# Altium PCB Projekat.PcbDoc
Units mm, origin at the board's own origin, x right, y up, seen from the top; angles counter-clockwise.
Board outline 81 x 149.5 mm, 2 copper layers (F.Cu, B.Cu); 58 components, 65 nets, 205 pads, 2 vias.
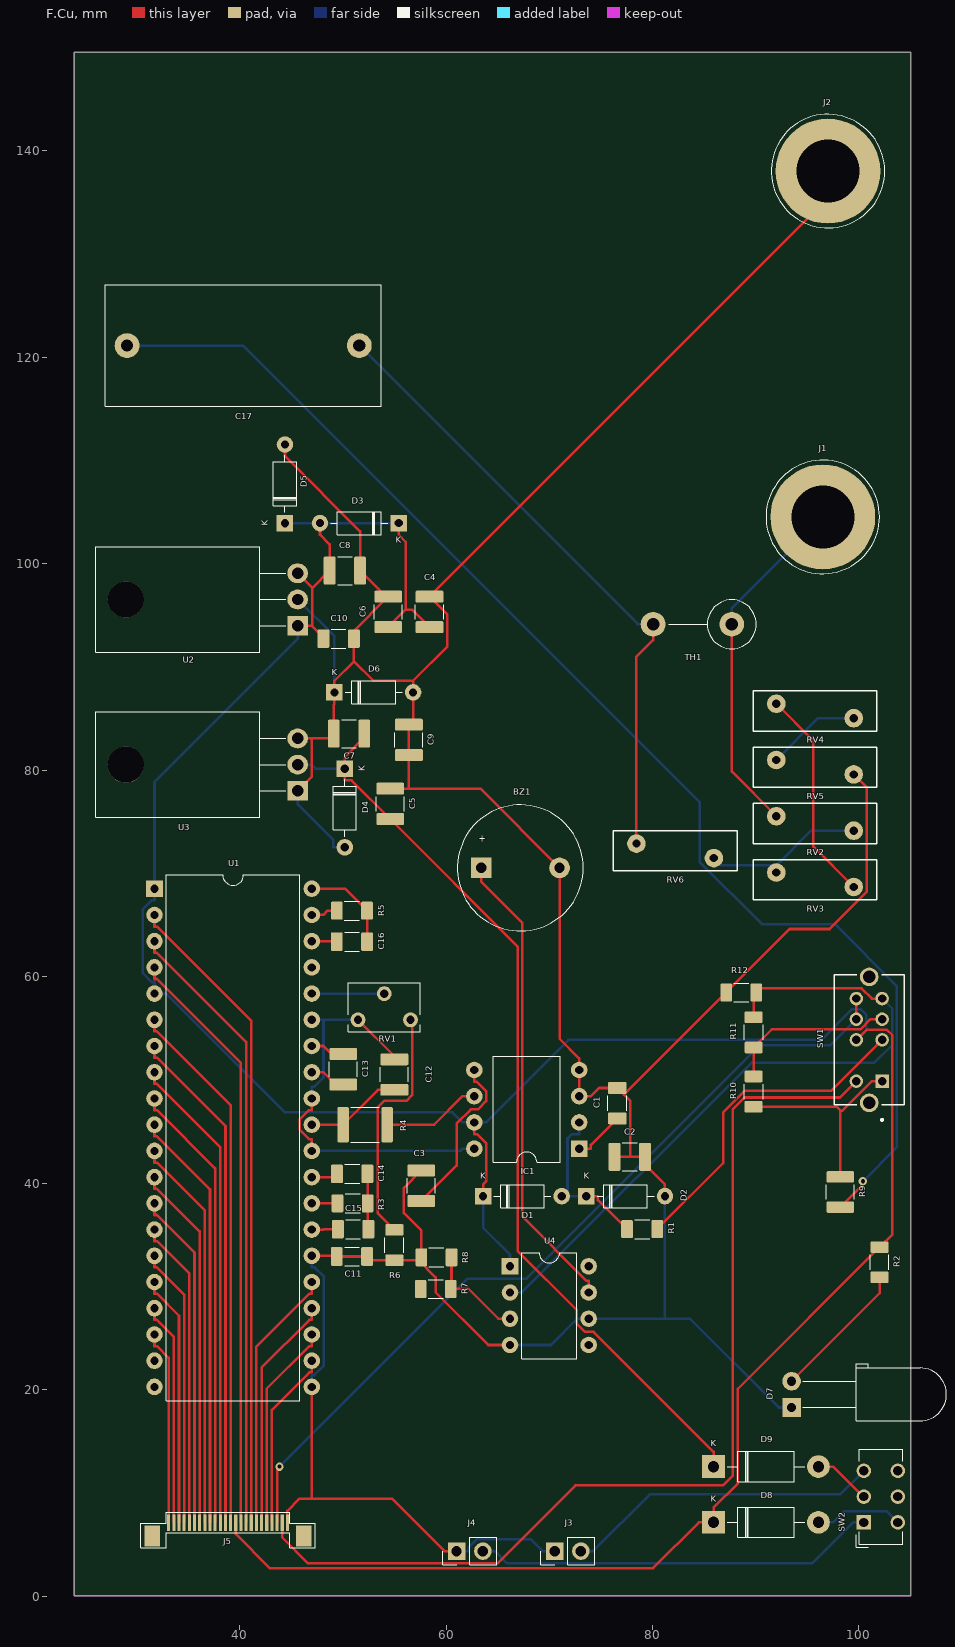
[diagram p0: F.Cu view]
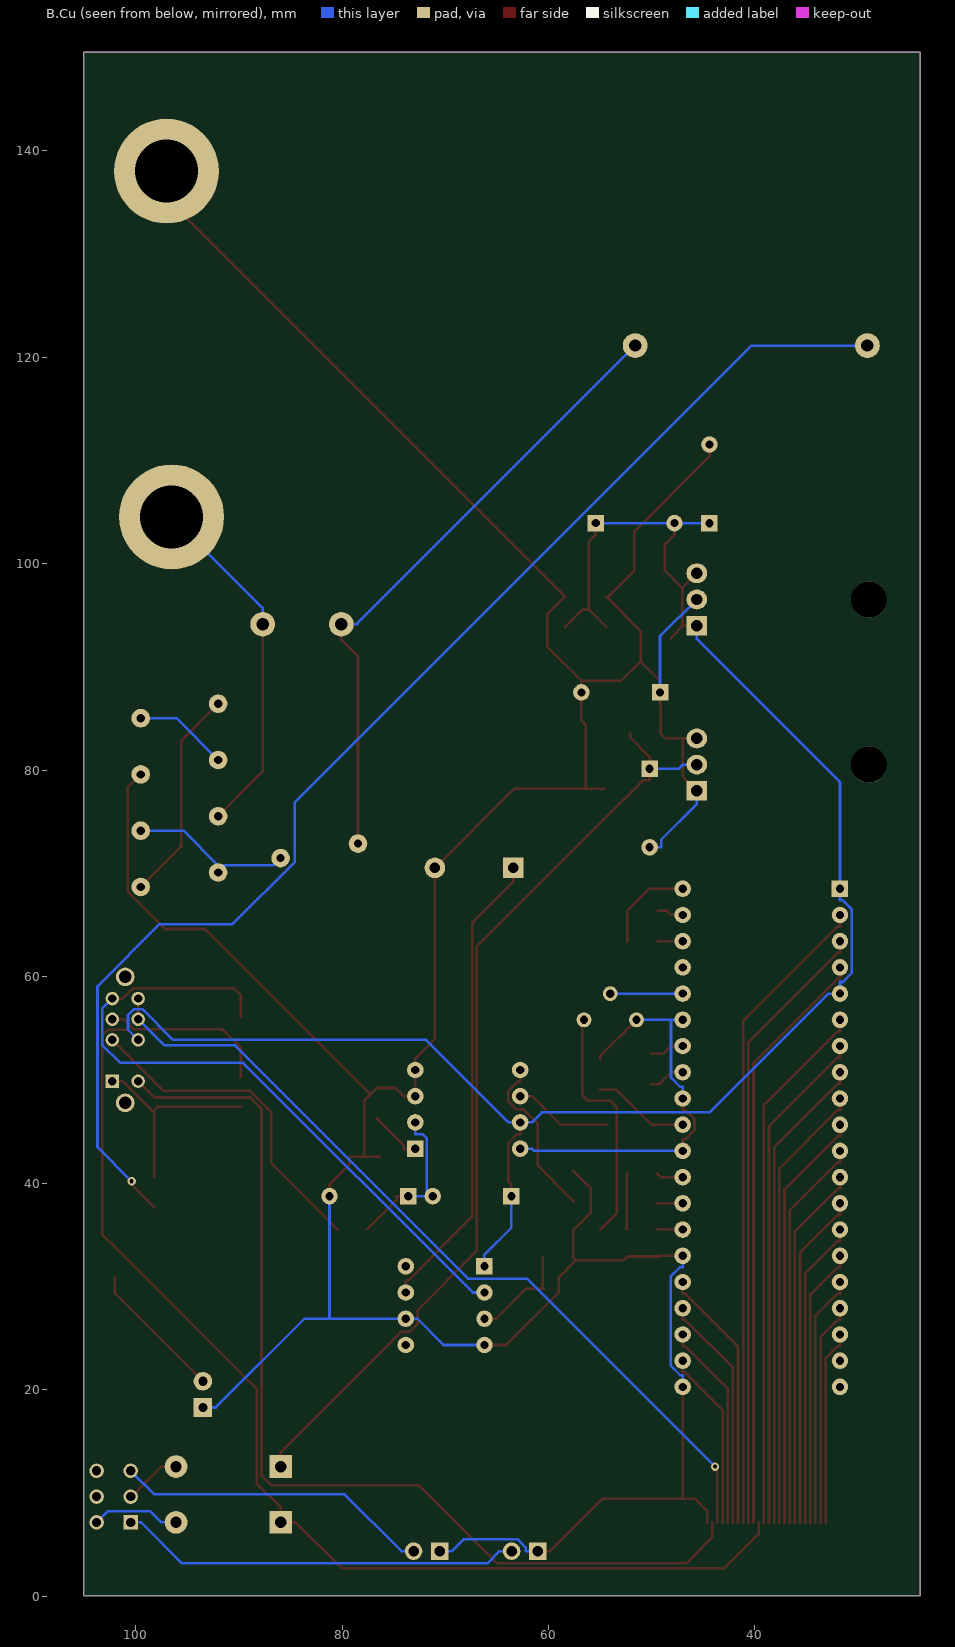
[diagram p1: B.Cu view, seen from below]

## Layer stack, top to bottom
F.Mask: solder mask 0.0102, Solder Resist, Dk 3.5
F.Cu: signal copper 0.0356
Dielectric 1: dielectric 0.32, FR-4, Dk 4.8
B.Cu: signal copper 0.0356
B.Mask: solder mask 0.0102, Solder Resist, Dk 3.5

## Board outline
24,149.55 24,0.05 105,0.05 105,149.55 24,149.55

## Design rules (kind name [scope] priority, off if disabled: settings)
Clearance [All] p1: gap=0.254 ignorepadtopadclearanceinfootprint=FALSE except(0: Arc-Hole Track-Hole SMDPad-Hole THPad-Hole Via-Hole Fill-Hole Poly-Hole Region-Hole Text-Hole)
MinimumSolderMaskSliver [All] p1: minsoldermaskwidth=0
PolygonConnect [All] p1: connectstyle=Direct reliefconductorwidth=0.254 reliefentries=4 polygonreliefangle="90 Angle" airgapwidth=0.254
RoutingVias [All] p1: holewidth=0.711 width=1.27 viastyle="Through Hole" minholewidth=0.711 minwidth=1.27 maxholewidth=0.711 maxwidth=1.27
SilkToSilkClearance [All] p1: silktosilkclearance=0
SilkToSolderMaskClearance [IsPad] p1: minsilkscreentomaskgap=0 clearancetoexposedcopper=TRUE
SolderMaskExpansion [All] p1: expansion=0.102 istentingtop=FALSE
Width [All] p1: maxlimit=10 minlimit=0.254 preferedwidth=0.254 minimp=50.000000 maximp=50.000000 favimp=50.000000
27 further rules are at their usual default settings.

## Components (designator, comment, footprint, x,y, rotation, side; value= is the part's Value field where it differs from the comment)
BZ1 "Buzzer" Buzzer_12x9.5RM7.6 63.4,70.55 r0 top
C1 "10u" C_1206_3216Metric 76.6,47.75 r90 top
C2 "1u" C_1210_3225Metric 77.8,42.55 r0 top
C3 "3u3" C_1210_3225Metric 57.6,39.75 r90 top
C4 "100u" C_1210_3225Metric 58.4,95.35 r90 top
C5 "100u" C_1210_3225Metric 54.6,76.75 r270 top
C6 "100n" C_1210_3225Metric 54.4,95.35 r90 top
C7 "100n" C_1210_3225Metric 50.6,83.55 r180 top
C8 "100n" C_1210_3225Metric 50.2,99.35 r0 top
C9 "100n" C_1210_3225Metric 56.4,82.95 r270 top
C10 "100u" C_1206_3216Metric 49.6,92.75 r0 top
C11 "100u" C_1206_3216Metric 50.885,32.905 r180 top
C12 "20p" C_1210_3225Metric 55,50.525 r90 top
C13 "100n" C_1210_3225Metric 50.046,51.05 r270 top
C14 "470n" C_1206_3216Metric 50.91,40.905 r180 top
C15 "220n" C_1206_3216Metric 51,35.55 r0 top
C16 "100p" C_1206_3216Metric 50.885,63.405 r180 top
C17 "22n 1000V" C_Rect_L26.5mm_W11.5mm_P22.50mm_MKS4 51.6,121.15 r180 top
D1 "1N4148" D_DO-35_SOD27_P7.62mm_Horizontal 63.59,38.75 r0 top
D2 "1N4148" D_DO-35_SOD27_P7.62mm_Horizontal 73.59,38.75 r0 top
D3 "1N4448" D_DO-35_SOD27_P7.62mm_Horizontal 55.41,103.95 r180 top
D4 "1N4448" D_DO-35_SOD27_P7.62mm_Horizontal 50.2,80.16 r270 top
D5 "1N4448" D_DO-35_SOD27_P7.62mm_Horizontal 44.4,103.94 r90 top
D6 "1N4448" D_DO-35_SOD27_P7.62mm_Horizontal 49.19,87.55 r0 top
D7 "Green" LED_D5.0mm_Horizontal_O6.35mm_Z15.0mm 93.475,18.275 r90 top
D8 "1N4002" D_DO-41_SOD81_P10.16mm_Horizontal 85.92,7.15 r0 top
D9 "1N4002" D_DO-41_SOD81_P10.16mm_Horizontal 85.92,12.55 r0 top
IC1 "AD737" DIP-8_W10.16mm 72.9,43.35 r180 top
J1 "VAC" Banana_Jack_1Pin 96.5,104.55 r0 top
J2 "COMM" Banana_Jack_1Pin 97,138.05 r0 top
J3 "Battery Connector" PinHeader_1x02_P2.54mm_Vertical 70.525,4.35 r90 top
J4 "Battery Connector" PinHeader_1x02_P2.54mm_Vertical 61.025,4.35 r90 top
J5 "FPC Connector" FPC_24 38.885,7.13 r0 top
R1 "47K" R_1206_3216Metric 79,35.55 r0 top
R2 "330" R_1206_3216Metric 102,32.35 r270 top
R3 "47K" R_1206_3216Metric 50.949,38.054 r0 top
R4 "1M" R_1812_4532Metric 52.165,45.666 r0 top
R5 "100K" R_1206_3216Metric 50.885,66.405 r180 top
R6 "24K" R_1206_3216Metric 55,34.012 r90 top
R7 "11K" R_1206_3216Metric 59,29.75 r0 top
R8 "1K5" R_1206_3216Metric 59.073,32.824 r180 top
R9 "11M" R_1210_3225Metric 98.2,39.15 r270 top
R10 "100K" R_1206_3216Metric 89.8,48.875 r90 top
R11 "10K" R_1206_3216Metric 89.8,54.612 r90 top
R12 "1K1" R_1206_3216Metric 88.6,58.475 r180 top
RV1 "Naponska referenca" Potentiometer_Bourns_3266W_Vertical 51.475,55.825 r180 top
RV2 "910V" RV_Disc_D12mm_W3.9mm_P7.5mm 92,75.55 r0 top
RV3 "910V" RV_Disc_D12mm_W3.9mm_P7.5mm 92,70.1 r0 top
RV4 "910V" RV_Disc_D12mm_W3.9mm_P7.5mm 92,86.45 r0 top
RV5 "910V" RV_Disc_D12mm_W3.9mm_P7.5mm 92,81 r0 top
RV6 "910V" RV_Disc_D12mm_W3.9mm_P7.5mm 78.45,72.9 r0 top
SW1 "Range selection" SW_EG2310 101,53.887 r90 top
SW2 "Power ON/OFF" SW_CuK_JS202011AQN_DPDT_Angled 100.475,7.143 r90 top
TH1 "PTC" R_Axial_DIN0414_L11.9mm_D4.5mm_P7.62mm_Vertical 87.685,94.15 r180 top
U1 "ICL7107CPL" DIP-40_W15.24mm 31.76,68.53 r0 top
U2 "L7806" TO-220-3_Horizontal_TabDown 45.63,94.01 r90 top
U3 "L7905" TO-220-3_Horizontal_TabDown 45.63,78.01 r90 top
U4 "AD8561" DIP-8_W7.62mm 66.2,31.95 r0 top

## Footprints (in the part's own frame and the unit in brackets; to place one, negate y for a bottom-side part, rotate by r counter-clockwise, add the part's x,y. Pads: shape width x height; smd on the part's side, far side on the other; paste and mask are expansions set on the pad)
Banana_Jack_1Pin [mm]
  round 10.16 hole 6.1 paste-2539.97 mask+0: 1(0,0)
  silkscreen extent -5.5,-5.5 5.5,5.5
Buzzer_12x9.5RM7.6 [mm]
  rect 2x2 hole 1 paste-2539.97 mask+0: 1(0,0)
  round 2 hole 1 paste-2539.97 mask+0: 2(7.6,0)
  silkscreen extent -2.3,-6.1 9.9,6.1
C_1206_3216Metric [mm]
  rrect22% 1.15x1.8 smd mask+0: 1(-1.475,0) 2(1.475,0)
  silkscreen extent -0.71,-0.91 0.71,0.91
C_1210_3225Metric [mm]
  rrect22% 1.15x2.7 smd mask+0: 1(-1.475,0) 2(1.475,0)
  silkscreen extent -0.71,-1.36 0.71,1.36
C_Rect_L26.5mm_W11.5mm_P22.50mm_MKS4 [mm]
  round 2.4 hole 1.2 paste-2539.97 mask+0: 1(0,0) 2(22.5,0)
  silkscreen extent -2.12,-5.87 24.62,5.87
D_DO-35_SOD27_P7.62mm_Horizontal [mm]
  rect 1.6x1.6 hole 0.8 paste-2539.97 mask+0: 1(0,0)
  rrect100% 1.6x1.6 hole 0.8 paste-2539.97 mask+0: 2(7.62,0)
  silkscreen extent 1.04,-1.12 6.58,1.12
D_DO-41_SOD81_P10.16mm_Horizontal [mm]
  rect 2.2x2.2 hole 1.1 paste-2539.97 mask+0: 1(0,0)
  rrect100% 2.2x2.2 hole 1.1 paste-2539.97 mask+0: 2(10.16,0)
  silkscreen extent 1.34,-1.47 8.82,1.47
DIP-8_W7.62mm [mm]
  rect 1.6x1.6 hole 0.8 paste-2539.97 mask+0: 1(0,0)
  rrect100% 1.6x1.6 hole 0.8 paste-2539.97 mask+0: 2(0,-2.54) 3(0,-5.08) 4(0,-7.62) 5(7.62,-7.62) 6(7.62,-5.08) 7(7.62,-2.54) 8(7.62,0)
  silkscreen extent 1.16,-8.95 6.46,1.33
DIP-8_W10.16mm [mm]
  rect 1.6x1.6 hole 0.8 paste-2539.97 mask+0: 1(0,0)
  rrect100% 1.6x1.6 hole 0.8 paste-2539.97 mask+0: 2(0,-2.54) 3(0,-5.08) 4(0,-7.62) 5(10.16,-7.62) 6(10.16,-5.08) 7(10.16,-2.54) 8(10.16,0)
  silkscreen extent 1.85,-8.95 8.31,1.33
DIP-40_W15.24mm [mm]
  rect 1.6x1.6 hole 0.8 paste-2539.97 mask+0: 1(0,0)
  rrect100% 1.6x1.6 hole 0.8 paste-2539.97 mask+0: 2(0,-2.54) 3(0,-5.08) 4(0,-7.62) 5(0,-10.16) 6(0,-12.7) 7(0,-15.24) 8(0,-17.78) 9(0,-20.32) 10(0,-22.86) 11(0,-25.4) 12(0,-27.94) 13(0,-30.48) 14(0,-33.02) 15(0,-35.56) 16(0,-38.1) 17(0,-40.64) 18(0,-43.18) 19(0,-45.72) 20(0,-48.26) 21(15.24,-48.26) 22(15.24,-45.72) 23(15.24,-43.18) 24(15.24,-40.64) 25(15.24,-38.1) 26(15.24,-35.56) 27(15.24,-33.02) 28(15.24,-30.48) 29(15.24,-27.94) 30(15.24,-25.4) 31(15.24,-22.86) 32(15.24,-20.32) 33(15.24,-17.78) 34(15.24,-15.24) 35(15.24,-12.7) 36(15.24,-10.16) 37(15.24,-7.62) 38(15.24,-5.08) 39(15.24,-2.54) 40(15.24,0)
  silkscreen extent 1.16,-49.59 14.08,1.33
FPC_24 [mm]
  rect 1.5x2 smd mask+0: 0(-7.35,-1.3) 0(7.35,-1.3)
  rect 0.3x1.6 smd mask+0: 1(-5.75,0) 2(-5.25,0) 3(-4.75,0) 4(-4.25,0) 5(-3.75,0) 6(-3.25,0) 7(-2.75,0) 8(-2.25,0) 9(-1.75,0) 10(-1.25,0) 11(-0.75,0) 12(-0.25,0) 13(0.25,0) 14(0.75,0) 15(1.25,0) 16(1.75,0) 17(2.25,0) 18(2.75,0) 19(3.25,0) 20(3.75,0) 21(4.25,0) 22(4.75,0) 23(5.25,0) 24(5.75,0)
  silkscreen extent -8.46,-2.42 8.46,0.98
LED_D5.0mm_Horizontal_O6.35mm_Z15.0mm [mm]
  rect 1.8x1.8 hole 0.9 paste-2539.97 mask+0: 1(0,0)
  round 1.8 hole 0.9 paste-2539.97 mask+0: 2(2.54,0)
  silkscreen extent -1.29,-15.01 4.23,-1.08
PinHeader_1x02_P2.54mm_Vertical [mm]
  rect 1.7x1.7 hole 1 paste-2539.97 mask+0: 1(0,0)
  rrect100% 1.7x1.7 hole 1 paste-2539.97 mask+0: 2(0,-2.54)
  silkscreen extent -1.33,-3.87 1.33,1.33
Potentiometer_Bourns_3266W_Vertical [mm]
  round 1.44 hole 0.8 paste-2539.97 mask+0: 1(0,0) 2(-2.54,-2.54) 3(-5.08,0)
  silkscreen extent -6.01,-3.6 0.93,1.14
R_1206_3216Metric [mm]
  rrect22% 1.125x1.75 smd mask+0: 1(-1.462,0) 2(1.462,0)
  silkscreen extent -0.73,-0.91 0.73,0.91
R_1210_3225Metric [mm]
  rrect22% 1.125x2.65 smd mask+0: 1(-1.462,0) 2(1.462,0)
  silkscreen extent -0.72,-1.36 0.72,1.36
R_1812_4532Metric [mm]
  rrect22% 1.125x3.4 smd mask+0: 1(-2.137,0) 2(2.137,0)
  silkscreen extent -1.39,-1.71 1.39,1.71
R_Axial_DIN0414_L11.9mm_D4.5mm_P7.62mm_Vertical [mm]
  round 2.4 hole 1.2 paste-2539.97 mask+0: 1(0,0)
  rrect100% 2.4x2.4 hole 1.2 paste-2539.97 mask+0: 2(7.62,0)
  silkscreen extent -2.37,-2.37 6.12,2.37
RV_Disc_D12mm_W3.9mm_P7.5mm [mm]
  round 1.8 hole 0.8 paste-2539.97 mask+0: 1(0,0) 2(7.5,-1.4)
  silkscreen extent -2.25,-2.65 9.75,1.25
SW_CuK_JS202011AQN_DPDT_Angled [mm]
  rect 1.4x1.4 hole 0.9 paste-2539.97 mask+0: 1(0,0)
  round 1.4 hole 0.9 paste-2539.97 mask+0: 2(2.5,0) 3(5,0) 4(0,-3.3) 5(2.5,-3.3) 6(5,-3.3)
  silkscreen extent -2.4,-3.75 7.1,0.75
SW_EG2310 [mm]
  rect 1.308x1.308 hole 0.8 paste-2539.97 mask+0.102: 1(-4,-1.25)
  round 1.308 hole 0.8 paste-2539.97 mask+0.102: 2(0,-1.25) 3(2,-1.25) 4(4,-1.25) 5(-4,1.25) 6(0,1.25) 7(2,1.25) 8(4,1.25)
  round 1.8 hole 1.2 paste-2539.97 mask+0.102: SH1(-6.1,0) SH2(6.1,0)
  silkscreen extent -7.85,-3.4 6.3,3.4
TO-220-3_Horizontal_TabDown [mm]
  rect 1.905x2 hole 1.1 paste-2539.97 mask+0: 1(0,0)
  rrect100% 1.905x2 hole 1.1 paste-2539.97 mask+0: 2(2.54,0) 3(5.08,0)
  rrect100% 3.5x3.5 hole 3.5 paste-2539.97 mask+0: Un1(2.54,16.66)
  silkscreen extent -2.58,1.15 7.66,19.58

## Part data
BZ1: library part Buzzer_12x9.5RM7.6, "Generic Buzzer, D12mm height 9.5mm with RM7.6mm", Sheetfile=Input.kicad_sch, Sheetname=Input
C1 C10 C11 C14 C15 C16: library part C_1206_3216Metric, "Capacitor SMD 1206 (3216 Metric), square (rectangular) end terminal, IPC_7351 nominal, (Body size source: IPC-SM-782 page 76, https://www.pcb-3d.com/wordpress/wp-content/uploads/ipc-sm-782a_amendment_1_and_2.pdf), generated with kicad-footprint-generator"
  C1: Sheetfile=rmstodc.kicad_sch, Sheetname=RMS-DC
  C10 C11: Sheetfile=VoltageSupply.kicad_sch, Sheetname="Voltage Supply 5V"
  C14 C15 C16: Sheetfile=icl7107pins.kicad_sch, Sheetname=7107-PINS
C2 C3 C4 C5 C6 C7 C8 C9 C12 C13: library part C_1210_3225Metric, "Capacitor SMD 1210 (3225 Metric), square (rectangular) end terminal, IPC_7351 nominal, (Body size source: IPC-SM-782 page 76, https://www.pcb-3d.com/wordpress/wp-content/uploads/ipc-sm-782a_amendment_1_and_2.pdf), generated with kicad-footprint-generator"
  C2 C3: Sheetfile=rmstodc.kicad_sch, Sheetname=RMS-DC
  C4 C5 C6 C7 C8 C9: Sheetfile=VoltageSupply.kicad_sch, Sheetname="Voltage Supply 5V"
  C12 C13: Sheetfile=icl7107pins.kicad_sch, Sheetname=7107-PINS
C17: library part C_Rect_L26.5mm_W11.5mm_P22.50mm_MKS4, "C, Rect series, Radial, pin pitch=22.50mm, , length*width=26.5*11.5mm^2, Capacitor, http://www.wima.com/EN/WIMA_MKS_4.pdf", Sheetfile=Input.kicad_sch, Sheetname=Input
D1 D2 D3 D4 D5 D6: library part D_DO-35_SOD27_P7.62mm_Horizontal, "Diode, DO-35_SOD27 series, Axial, Horizontal, pin pitch=7.62mm, , length*diameter=4*2mm^2, , http://www.diodes.com/_files/packages/DO-35.pdf"
  D1 D2: Sheetfile=rmstodc.kicad_sch, Sheetname=RMS-DC
  D3 D4 D5 D6: Sheetfile=VoltageSupply.kicad_sch, Sheetname="Voltage Supply 5V"
D7: library part LED_D5.0mm_Horizontal_O6.35mm_Z15.0mm, "LED, diameter 5.0mm z-position of LED center 3.0mm, 2 pins, diameter 5.0mm z-position of LED center 3.0mm, 2 pins, diameter 5.0mm z-position of LED center 3.0mm, 2 pins, diameter 5.0mm z-position of LED center 9.0mm, 2 pins, diameter 5.0mm z-position of LED center 9.0mm, 2 pins, diameter 5.0mm z-position of LED center 9.0mm, 2 pins, diameter 5.0mm z-position of LED center 15.0mm, 2 pins, diameter 5.0mm z-position of LED center 15.0mm, 2 pins, diameter 5.0mm z-position of LED center 15.0mm, 2 pins", Sheetfile=VoltageSupply.kicad_sch, Sheetname="Voltage Supply 5V"
D8 D9: library part D_DO-41_SOD81_P10.16mm_Horizontal, "Diode, DO-41_SOD81 series, Axial, Horizontal, pin pitch=10.16mm, , length*diameter=5.2*2.7mm^2, , http://www.diodes.com/_files/packages/DO-41%20(Plastic).pdf", Sheetfile=Battery.kicad_sch, Sheetname=Battery
IC1: library part DIP-8_W10.16mm, "8-lead though-hole mounted DIP package, row spacing 10.16 mm (400 mils)", Sheetfile=rmstodc.kicad_sch, Sheetname=RMS-DC
J1 J2: library part Banana_Jack_1Pin, "Single banana socket, footprint - 6mm drill", Sheetfile=Input.kicad_sch, Sheetname=Input
J3 J4: library part PinHeader_1x02_P2.54mm_Vertical, "Through hole straight pin header, 1x02, 2.54mm pitch, single row", Sheetfile=Battery.kicad_sch, Sheetname=Battery
J5: library part FPC_24, Sheetfile=ffccon.kicad_sch, Sheetname="FFC Connector"
R1: library part R_1206_3216Metric, "Resistor SMD 1206 (3216 Metric), square (rectangular) end terminal, IPC_7351 nominal, (Body size source: IPC-SM-782 page 72, https://www.pcb-3d.com/wordpress/wp-content/uploads/ipc-sm-782a_amendment_1_and_2.pdf), generated with kicad-footprint-generator", Power Rating=1W, Sheetfile=rmstodc.kicad_sch, Sheetname=RMS-DC
R2 R3 R5 R6 R7 R8 R10 R11 R12: library part R_1206_3216Metric, "Resistor SMD 1206 (3216 Metric), square (rectangular) end terminal, IPC_7351 nominal, (Body size source: IPC-SM-782 page 72, https://www.pcb-3d.com/wordpress/wp-content/uploads/ipc-sm-782a_amendment_1_and_2.pdf), generated with kicad-footprint-generator"
  R2: Sheetfile=VoltageSupply.kicad_sch, Sheetname="Voltage Supply 5V"
  R3 R5 R6: Sheetfile=icl7107pins.kicad_sch, Sheetname=7107-PINS
  R7 R8 R10 R11 R12: Sheetfile=Input.kicad_sch, Sheetname=Input
R4: library part R_1812_4532Metric, "Resistor SMD 1812 (4532 Metric), square (rectangular) end terminal, IPC_7351 nominal, (Body size source: https://www.nikhef.nl/pub/departments/mt/projects/detectorR_D/dtddice/ERJ2G.pdf), generated with kicad-footprint-generator", Sheetfile=icl7107pins.kicad_sch, Sheetname=7107-PINS
R9: library part R_1210_3225Metric, "Resistor SMD 1210 (3225 Metric), square (rectangular) end terminal, IPC_7351 nominal, (Body size source: IPC-SM-782 page 72, https://www.pcb-3d.com/wordpress/wp-content/uploads/ipc-sm-782a_amendment_1_and_2.pdf), generated with kicad-footprint-generator", Sheetfile=Input.kicad_sch, Sheetname=Input
RV1: library part Potentiometer_Bourns_3266W_Vertical, "Potentiometer, vertical, Bourns 3266W, https://www.bourns.com/docs/Product-Datasheets/3266.pdf", Sheetfile=icl7107pins.kicad_sch, Sheetname=7107-PINS
RV2 RV3 RV4 RV5 RV6: library part RV_Disc_D12mm_W3.9mm_P7.5mm, "Varistor, diameter 12mm, width 3.9mm, pitch 7.5mm", Sheetfile=Input.kicad_sch, Sheetname=Input
SW1: library part SW_EG2310, MANUFACTURER=E-Switch, MAXIMUM_PACKAGE_HEIGHT=4.7mm, Package=None, Availability="In Stock", Check_prices=https://www.snapeda.com/parts/EG2310/E-Switch/view-part/?ref=eda, Description="\nSlide Switch DP3T Through Hole, Right Angle\n", MF=E-Switch, MP=EG2310, PARTREV=-, Price=None, Purchase-URL=https://www.snapeda.com/api/url_track_click_mouser/?unipart_id=396456&manufacturer=E-Switch&part_name=EG2310&search_term=None, SNAPEDA_PN=EG2310, STANDARD="Manufacturer Recommendations", Sheetfile=Input.kicad_sch, Sheetname=Input, SnapEDA_Link=https://www.snapeda.com/parts/EG2310/E-Switch/view-part/?ref=snap
SW2: library part SW_CuK_JS202011AQN_DPDT_Angled, "CuK sub miniature slide switch, JS series, DPDT, right angle, http://www.ckswitches.com/media/1422/js.pdf", Sheetfile=Battery.kicad_sch, Sheetname=Battery
TH1: library part R_Axial_DIN0414_L11.9mm_D4.5mm_P7.62mm_Vertical, "Resistor, Axial_DIN0414 series, Axial, Vertical, pin pitch=7.62mm, 2W, length*diameter=11.9*4.5mm^2, http://www.vishay.com/docs/20128/wkxwrx.pdf", Sheetfile=Input.kicad_sch, Sheetname=Input
U1: library part DIP-40_W15.24mm, "40-lead though-hole mounted DIP package, row spacing 15.24 mm (600 mils)", Sheetfile=Projekat.kicad_sch
U2 U3: library part TO-220-3_Horizontal_TabDown, "TO-220-3, Horizontal, RM 2.54mm, see https://www.vishay.com/docs/66542/to-220-1.pdf", Sheetfile=VoltageSupply.kicad_sch, Sheetname="Voltage Supply 5V"
U4: library part DIP-8_W7.62mm, "8-lead though-hole mounted DIP package, row spacing 7.62 mm (300 mils)", Sheetfile=Input.kicad_sch, Sheetname=Input

## Via types
v1: diameter 0.8, hole 0.4, F.Cu to B.Cu, tented both sides, 2 vias

## Nets (pads, with @x,y where several pads share a name; then routed paths per layer and width w, separated by ;. In a path a pad name is that pad's centre, name@x,y a point inside that pad or via, vN(x,y) a via of type N, cw(c..) or ccw(c..) an arc to the next point about the centre after c; other vN are vias at no path point)
20V_RANGE: J5.23 SW1.5 | length 98.2
  F.Cu w0.25: J5.23 44.135,5.686 46.648,3.173 64.973,3.173 72.523,10.723 86.838,10.723 87.796,11.681 87.796,47.172 88.928,48.303 98.165,48.303 SW1.5
1000V_RANGE: J5.22 SW1.7 SW1.8 | length 81.3
  F.Cu w0.25: J5.22 43.635,12.306 v1(43.87,12.541) ; SW1.7 SW1.8
  B.Cu w0.25: v1(43.87,12.541) 62.082,30.752 67.802,30.752 90.418,53.368 97.23,53.368 SW1.7
+5V: R7.1
-5V: BZ1.2 C1.2 C2.1 C2.2 C3.2 C4.2 C5.1 C6.2 C7.2 C8.2 C9.1 C9.2 C10.2 C11.1 C11.2 D2.2 D4.2 D5.2 D6.1 D6.2 D7.1 IC1.3 IC1.4 J2.1 J3.1 J4.1 J5.24 R6.1 R8.2 R12.2 RV5.2 U1.21 U1.26 U2.2 U3.1 U3.3 U4.4 U4.6 | length 384.8
  F.Cu w0.25: D5.2 44.4,110.433 51.675,103.158 C8.2 C6.2@54.3,96.725 ; J5.24 44.635,8.257 45.818,9.439 47,9.439 ; U3.1 46.987,79.367 46.987,83.09 ; U3.3 46.987,83.09 ; U1.21 47,19.143 47,9.439 ; U1.26 49.345,32.97 C11.2 C11.1 52.715,32.55 R6.1 R8.2@57.336,32.55 ; C6.2 C6.2@54.3,96.725 ; C5.1 56.4,78.225 ; C3.2 55.921,39.546 55.921,37.094 57.611,35.404 R8.2 R8.2@57.336,32.55 ; J4.1 59.848,4.35 54.759,9.439 47,9.439 ; U4.4 64.107,24.33 59,29.437 59,30.886 R8.2@57.336,32.55 ; C2.1 77.864,42.55 ; D2.2 81.21,39.877 79.275,41.812 C2.2 77.864,42.55 ; J2.1 97,135.425 C4.2 60.129,95.097 60.129,91.995 56.81,88.677 ; RV5.2 100.775,78.325 100.775,68.24 97.161,64.626 93.288,64.626 R12.2 77.244,48.581 ; 46.987,83.09 48.665,83.09 C7.2 49.125,86.358 49.19,86.423 D6.1 49.19,88.677 51.075,90.562 ; 51.075,90.562 52.96,88.677 56.81,88.677 ; 51.075,90.562 C10.2 51.075,93.5 C6.2@54.3,96.725 ; 56.4,78.225 63.325,78.225 BZ1.2 71,53.997 72.9,52.097 IC1.4 IC1.3 74.027,48.43 74.822,49.225 C1.2 77.244,48.581 ; 56.4,78.225 C9.2 C9.1 56.81,84.835 D6.2 56.81,88.677 ; 77.244,48.581 77.864,47.961 77.864,42.55
  B.Cu w0.25: U3.1 45.63,76.731 49.073,73.287 49.073,72.54 D4.2 ; U2.2 49.19,92.99 D6.1 ; U1.21 47,21.397 47.233,21.397 48.163,22.326 48.163,30.962 47.282,31.843 47,31.843 U1.26 ; J4.1 62.202,4.35 62.202,4.718 63.011,5.527 68.171,5.527 69.348,4.35 J3.1 ; U4.4 70.153,24.33 72.693,26.87 U4.6 81.21,26.87 ; D2.2 81.21,37.623 81.21,26.87 ; D7.1 92.248,18.275 83.653,26.87 81.21,26.87
-9V: C5.2 C7.1 D4.1 D9.1 U3.2 | length 92.2
  F.Cu w0.25: C7.1 52.075,83.162 50.2,81.287 D4.1 50.2,79.033 50.842,79.033 C5.2 66.949,62.926 66.949,33.449 72.655,27.743 72.655,26.395 73.45,25.6 74.297,25.6 85.92,13.977 D9.1
  B.Cu w0.25: U3.2 46.957,80.55 47.347,80.16 D4.1
A-Z: C14.2 U1.29 | length 2.6
  F.Cu w0.25: U1.29 49.12,40.59 C14.2
AD737_COM: C12.2 IC1.8 RV1.1 U1.30 U1.32 U1.35 | length 40.1
  F.Cu w0.25: U1.30 47,44.257 46.767,44.257 45.851,45.173 45.851,46.215 46.718,47.083 47,47.083 U1.32 ; RV1.1 55,52.3 C12.2
  B.Cu w0.25: U1.30 61.393,43.13 61.613,43.35 IC1.8 ; U1.32 47,49.337 47.233,49.337 48.132,50.235 48.132,55.825 ; U1.35 48.127,55.83 48.132,55.825 ; RV1.1 48.132,55.825
AD737_OUTPUT: IC1.6 R4.2 | length 9.6
  F.Cu w0.25: R4.2 58.849,45.666 61.613,48.43 IC1.6
BUFF: R3.1 U1.28 | length 2.5
  F.Cu w0.25: U1.28 49.482,38.05 R3.1
Cc: C1.1 IC1.1 | length 5.1
  F.Cu w0.25: IC1.1 74.027,43.35 74.027,43.702 C1.1
CREF+: C13.1 U1.34 | length 3.4
  F.Cu w0.25: U1.34 48.127,53.29 48.892,52.525 C13.1
CREF-: C13.2 U1.33 | length 3.5
  F.Cu w0.25: U1.33 48.127,50.75 49.302,49.575 C13.2
ICL7107_A1: C4.1 C6.1 C8.1 C10.1 D1.1 D3.1 D3.2 D5.1 D8.1 IC1.7 J5.14 R2.1 SW1.6 U1.1 U1.5 U2.1 U2.3 U4.1 | length 290.5
  F.Cu w0.25: J5.14 39.635,6.003 42.923,2.715 80.058,2.715 84.493,7.15 D8.1 85.92,8.577 88.276,10.933 88.276,20.088 R2.1 103.24,35.052 103.24,54.334 102.688,54.886 100.775,54.886 99.776,53.887 SW1.6 ; U2.1 46.844,94.01 46.955,94.01 ; U2.3 47.044,97.676 ; D3.2 47.79,102.823 48.725,101.888 C8.1 48.718,99.35 47.044,97.676 ; C10.1 48.125,92.841 46.956,94.01 ; C6.1 56.091,95.566 ; D3.1 55.41,102.823 56.091,102.142 56.091,95.566 ; C4.1 56.709,95.566 56.091,95.566 ; IC1.7 62.74,44.763 63.022,44.763 63.896,43.889 63.896,40.183 63.59,39.877 D1.1 ; 46.956,94.01 47.044,94.098 47.044,97.676
  B.Cu w0.25: D5.1 46.653,103.94 46.663,103.95 D3.2 D3.1 ; U2.1 45.63,92.731 31.76,78.861 U1.1 31.76,67.403 31.478,67.403 30.633,66.558 30.633,60.342 31.478,59.497 31.76,59.497 U1.5 32.887,58.37 44.394,46.863 60.64,46.863 61.613,45.89 IC1.7 63.867,45.89 71.864,53.887 96.363,53.887 99.344,56.868 100.156,56.868 100.731,56.294 100.731,54.869 SW1.6 ; D1.1 63.59,35.687 66.2,33.077 U4.1
ICL7107_A2: J5.7 U1.12 | length 35.4
  F.Cu w0.25: U1.12 31.76,39.463 31.993,39.463 36.135,35.322 J5.7
ICL7107_A3: J5.20 U1.23 | length 20.2
  F.Cu w0.25: J5.20 42.635,20.092 46.767,24.223 47,24.223 U1.23
ICL7107_AB4: U1.19
ICL7107_B1: J5.15 U1.4 | length 57.4
  F.Cu w0.25: U1.4 31.76,59.783 31.993,59.783 40.135,51.642 J5.15
ICL7107_B2: J5.8 U1.11 | length 38.2
  F.Cu w0.25: U1.11 31.76,42.003 31.993,42.003 36.635,37.362 J5.8
ICL7107_B3: J5.3 U1.16 | length 24.4
  F.Cu w0.25: U1.16 31.76,29.303 31.993,29.303 34.135,27.162 J5.3
ICL7107_C1: J5.16 U1.3 | length 60.1
  F.Cu w0.25: U1.3 31.76,62.323 31.993,62.323 40.635,53.682 J5.16
ICL7107_C2: J5.9 U1.10 | length 40.9
  F.Cu w0.25: U1.10 31.76,44.543 31.993,44.543 37.135,39.402 J5.9
ICL7107_C3: J5.19 U1.24 | length 22.9
  F.Cu w0.25: J5.19 42.135,22.132 46.767,26.763 47,26.763 U1.24
ICL7107_D1: J5.17 U1.2 | length 62.9
  F.Cu w0.25: U1.2 31.76,64.863 31.993,64.863 41.135,55.722 J5.17
ICL7107_D2: J5.10 U1.9 | length 43.7
  F.Cu w0.25: U1.9 31.76,47.083 31.993,47.083 37.635,41.442 J5.10
ICL7107_D3: J5.4 U1.15 | length 27.2
  F.Cu w0.25: U1.15 31.76,31.843 31.993,31.843 34.635,29.202 J5.4
ICL7107_E1: J5.11 U1.8 | length 46.4
  F.Cu w0.25: U1.8 31.76,49.623 31.993,49.623 38.135,43.482 J5.11
ICL7107_E2: J5.5 U1.14 | length 29.9
  F.Cu w0.25: U1.14 31.76,34.383 31.993,34.383 35.135,31.242 J5.5
ICL7107_E3: J5.1 U1.18 | length 18.9
  F.Cu w0.25: U1.18 31.76,24.223 31.993,24.223 33.135,23.082 J5.1
ICL7107_F1: J5.13 U1.6 | length 51.9
  F.Cu w0.25: U1.6 31.76,54.703 31.993,54.703 39.135,47.562 J5.13
ICL7107_F2: J5.6 U1.13 | length 32.7
  F.Cu w0.25: U1.13 31.76,36.923 31.993,36.923 35.635,33.282 J5.6
ICL7107_F3: J5.2 U1.17 | length 21.7
  F.Cu w0.25: U1.17 31.76,26.763 31.993,26.763 33.635,25.122 J5.2
ICL7107_G1: J5.12 U1.7 | length 49.1
  F.Cu w0.25: U1.7 31.76,52.163 31.993,52.163 38.635,45.522 J5.12
ICL7107_G2: J5.18 U1.25 | length 25.7
  F.Cu w0.25: J5.18 41.635,24.172 46.767,29.303 47,29.303 U1.25
ICL7107_G3: J5.21 U1.22 | length 17.4
  F.Cu w0.25: J5.21 43.135,18.052 46.767,21.683 47,21.683 U1.22
IN_HI: C12.1 R4.1 U1.31 | length 9.4
  F.Cu w0.25: U1.31 50.024,45.67 R4.1 53.412,49.05 C12.1
INT: C15.1 U1.27 | length 2.5
  F.Cu w0.25: U1.27 48.127,35.51 48.167,35.55 C15.1
Net-(BZ1-Pad1): BZ1.1 U4.7 | length 45.6
  F.Cu w0.25: BZ1.1 63.4,69.223 67.401,65.223 67.401,36.755 73.618,30.537 73.82,30.537 U4.7
Net-(C3-Pad1): C3.1 IC1.5 | length 16.3
  F.Cu w0.25: C3.1 61.033,41.708 61.033,45.781 62.412,47.16 63.101,47.16 63.891,47.95 63.891,48.925 62.974,49.843 62.74,49.843 IC1.5
Net-(C14-Pad1): C14.1 C15.2 R3.2 | length 5.4
  F.Cu w0.25: C14.1 52.411,40.879 R3.2 52.411,35.614 C15.2
Net-(C17-Pad1): C17.1 RV6.1 TH1.2 | length 61.6
  F.Cu w0.25: RV6.1 78.45,91.008 80.065,92.623 TH1.2
  B.Cu w0.25: C17.1 78.538,94.212 78.538,94.15 TH1.2
Net-(C17-Pad2): C17.2 R9.2 | length 127.3
  F.Cu w0.25: R9.2 100.38,39.867 v1(100.38,40.187)
  B.Cu w0.25: C17.2 40.334,121.15 84.567,76.917 84.567,71.136 90.613,65.091 97.671,65.091 103.683,59.079 103.683,43.49 v1(100.38,40.187)
Net-(D1-Pad2): D1.2 D2.1 IC1.2 R1.1 | length 15.9
  F.Cu w0.25: D2.1 74.717,38.75 74.717,38.371 R1.1
  B.Cu w0.25: D1.2 D1.2@71.773,38.75 ; IC1.2 72.9,44.763 72.185,44.763 71.773,44.351 D1.2@71.773,38.75 ; D2.1 D1.2@71.773,38.75
Net-(D7-Pad2): D7.2 R2.2 | length 13.6
  F.Cu w0.25: D7.2 102,29.34 R2.2
Net-(D8-Pad2): D8.2 SW2.4 | length 8.6
  B.Cu w0.25: D8.2 97.507,7.15 98.59,8.233 102.684,8.233 SW2.4
Net-(D9-Pad2): D9.2 SW2.2 | length 5.6
  F.Cu w0.25: D9.2 97.507,12.55 100.414,9.643 SW2.2
Net-(J1-Pad1): J1.1 RV2.1 TH1.1 | length 34.4
  F.Cu w0.25: TH1.1 87.685,79.865 RV2.1
  B.Cu w0.25: TH1.1 87.685,95.735 J1.1
Net-(J3-Pad2): J3.2 SW2.3 | length 30.6
  B.Cu w0.25: J3.2 74.242,4.35 79.742,9.85 98.183,9.85 SW2.3
Net-(J4-Pad2): J4.2 SW2.1 | length 39
  B.Cu w0.25: J4.2 64.742,4.35 65.919,3.173 95.479,3.173 99.448,7.143 SW2.1
Net-(R6-Pad2): R6.2 RV1.3 | length 23.7
  F.Cu w0.25: R6.2 53.376,37.099 53.376,47.347 54.005,47.975 56.169,47.975 56.721,48.527 56.721,55.659 RV1.3
Net-(R7-Pad2): R7.2 R8.1 U4.3 | length 10
  F.Cu w0.25: R7.2 60.499,29.787 R7.2@60.536,29.787 ; R8.1 R7.2@60.536,29.787 ; U4.3 65.073,26.87 62.156,29.787 R7.2@60.536,29.787
Net-(R10-Pad1): R9.1 R10.1 SW1.1 | length 20.2
  F.Cu w0.25: R10.1 97.827,47.412 98.2,47.04 ; R9.1 98.2,47.04 ; SW1.1 101.251,49.887 98.403,47.04 98.2,47.04
Net-(R10-Pad2): R10.2 R11.1 SW1.3 | length 16.4
  F.Cu w0.25: R10.2 R11.1 91.557,54.907 100.156,54.907 101.137,55.888 SW1.3
Net-(R11-Pad2): R11.2 R12.1 SW1.4 U4.2 | length 67.1
  F.Cu w0.25: R11.2 89.8,58.212 R12.1 90.46,58.872 100.266,58.872 101.251,57.887 SW1.4
  B.Cu w0.25: U4.2 67.327,29.41 89.573,51.656 101.48,51.656 103.231,53.407 103.231,56.907 SW1.4
Net-(RV2-Pad2): RV2.2 RV3.1 RV6.2 | length 15.9
  B.Cu w0.25: RV6.2 86.654,70.796 RV3.1@92,70.796 ; RV3.1 RV3.1@92,70.796 ; RV2.2 95.354,74.15 RV3.1@92,70.796
Net-(RV3-Pad2): RV3.2 RV4.1 | length 20.9
  F.Cu w0.25: RV4.1 95.591,82.859 95.591,72.609 RV3.2
Net-(RV4-Pad2): RV4.2 RV5.1 | length 9.2
  B.Cu w0.25: RV5.1 96.05,85.05 RV4.2
OSC1: C16.1 R5.1 U1.40 | length 9.2
  F.Cu w0.25: U1.40 50.223,68.53 R5.1 52.36,66.392 C16.1
OSC2: R5.2 U1.39 | length 2.6
  F.Cu w0.25: U1.39 48.127,65.99 48.542,66.405 R5.2
OSC3: C16.2 U1.38 | length 2.4
  F.Cu w0.25: U1.38 49.365,63.45 C16.2
REF_HI: RV1.2 U1.36 | length 7
  B.Cu w0.25: U1.36 48.127,58.37 48.132,58.365 RV1.2
unconnected-(U1-Pad20): U1.20
unconnected-(U1-Pad37): U1.37
unconnected-(U4-Pad5): U4.5
unconnected-(U4-Pad8): U4.8
Vin: R1.2 SW1.2 | length 32.3
  F.Cu w0.25: R1.2 86.849,41.936 86.849,46.865 88.925,48.942 97.304,48.942 SW1.2
pads on no net: J5.0 SW1.SH1 SW1.SH2 SW2.5 SW2.6 U2.Un1 U3.Un1

## Keep-outs
Edge.Cuts:
  lines w0.1: 24,0.05 105,0.05 ; 24,0.05 24,149.55 ; 24,0.05 105,0.05 ; 24,0.05 24,149.55 ; 24,149.55 105,149.55 ; 24,149.55 105,149.55 ; 105,0.05 105,149.55 ; 105,0.05 105,149.55

## Text inside footprints (layer, text, board x,y; h text height)
BZ1: F.Fab "+" at 63.179,72.879 h1; F.SilkS "+" at 63.179,72.879 h1
D1: F.Fab "K" at 63.326,40.23 h1; F.SilkS "K" at 63.326,40.23 h1
D2: F.Fab "K" at 73.326,40.23 h1; F.SilkS "K" at 73.326,40.23 h1
D3: F.Fab "K" at 55.146,101.83 h1; F.SilkS "K" at 55.146,101.83 h1
D4: F.Fab "K" at 52.32,79.896 h1 r90; F.SilkS "K" at 52.32,79.896 h1 r90
D5: F.Fab "K" at 42.92,103.676 h1 r90; F.SilkS "K" at 42.92,103.676 h1 r90
D6: F.Fab "K" at 48.926,89.03 h1; F.SilkS "K" at 48.926,89.03 h1
D8: F.Fab "K" at 85.656,8.93 h1; F.SilkS "K" at 85.656,8.93 h1
D9: F.Fab "K" at 85.656,14.33 h1; F.SilkS "K" at 85.656,14.33 h1